# Altium PCB CoreEP3C16.PcbDoc
Units mil, origin at the board's own origin, x right, y up, seen from the top; angles counter-clockwise.
Board outline 6000 x 4000 mil, 2 copper layers (Top Layer, Bottom Layer); 4 components, 0 nets, 154 pads, 0 vias.
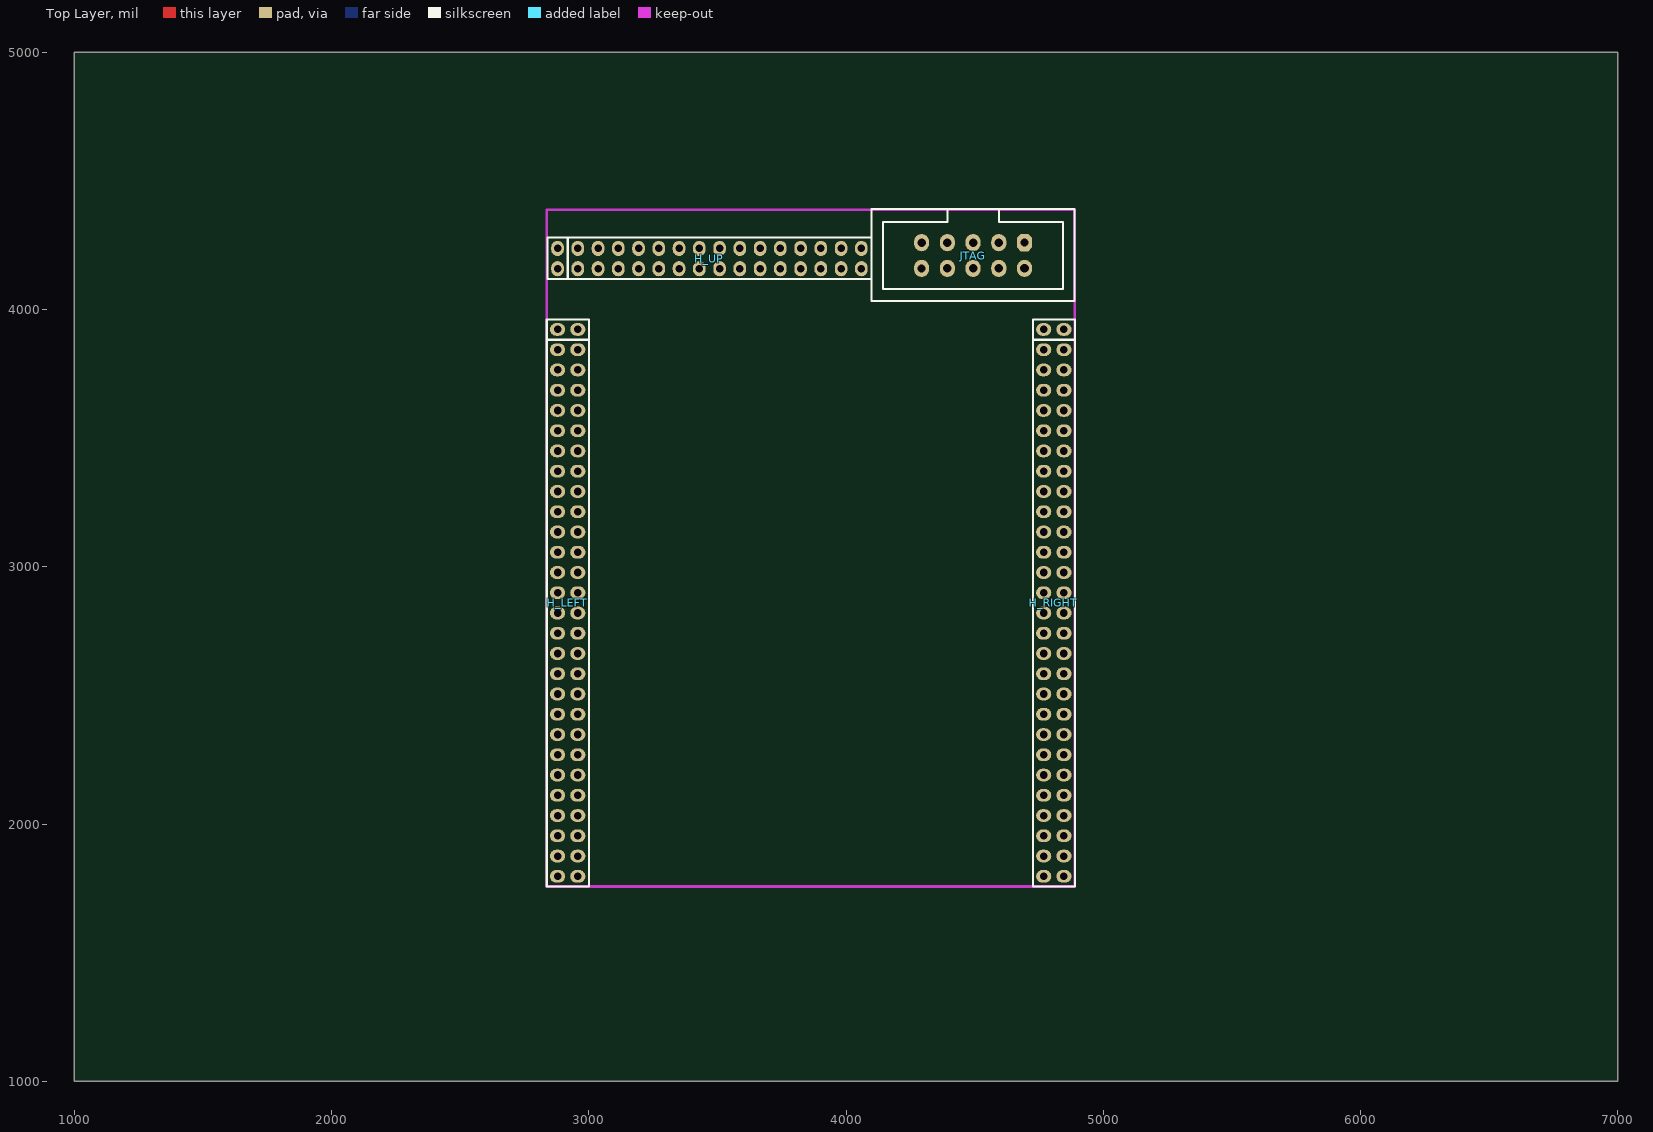
[diagram p0: Top Layer view]
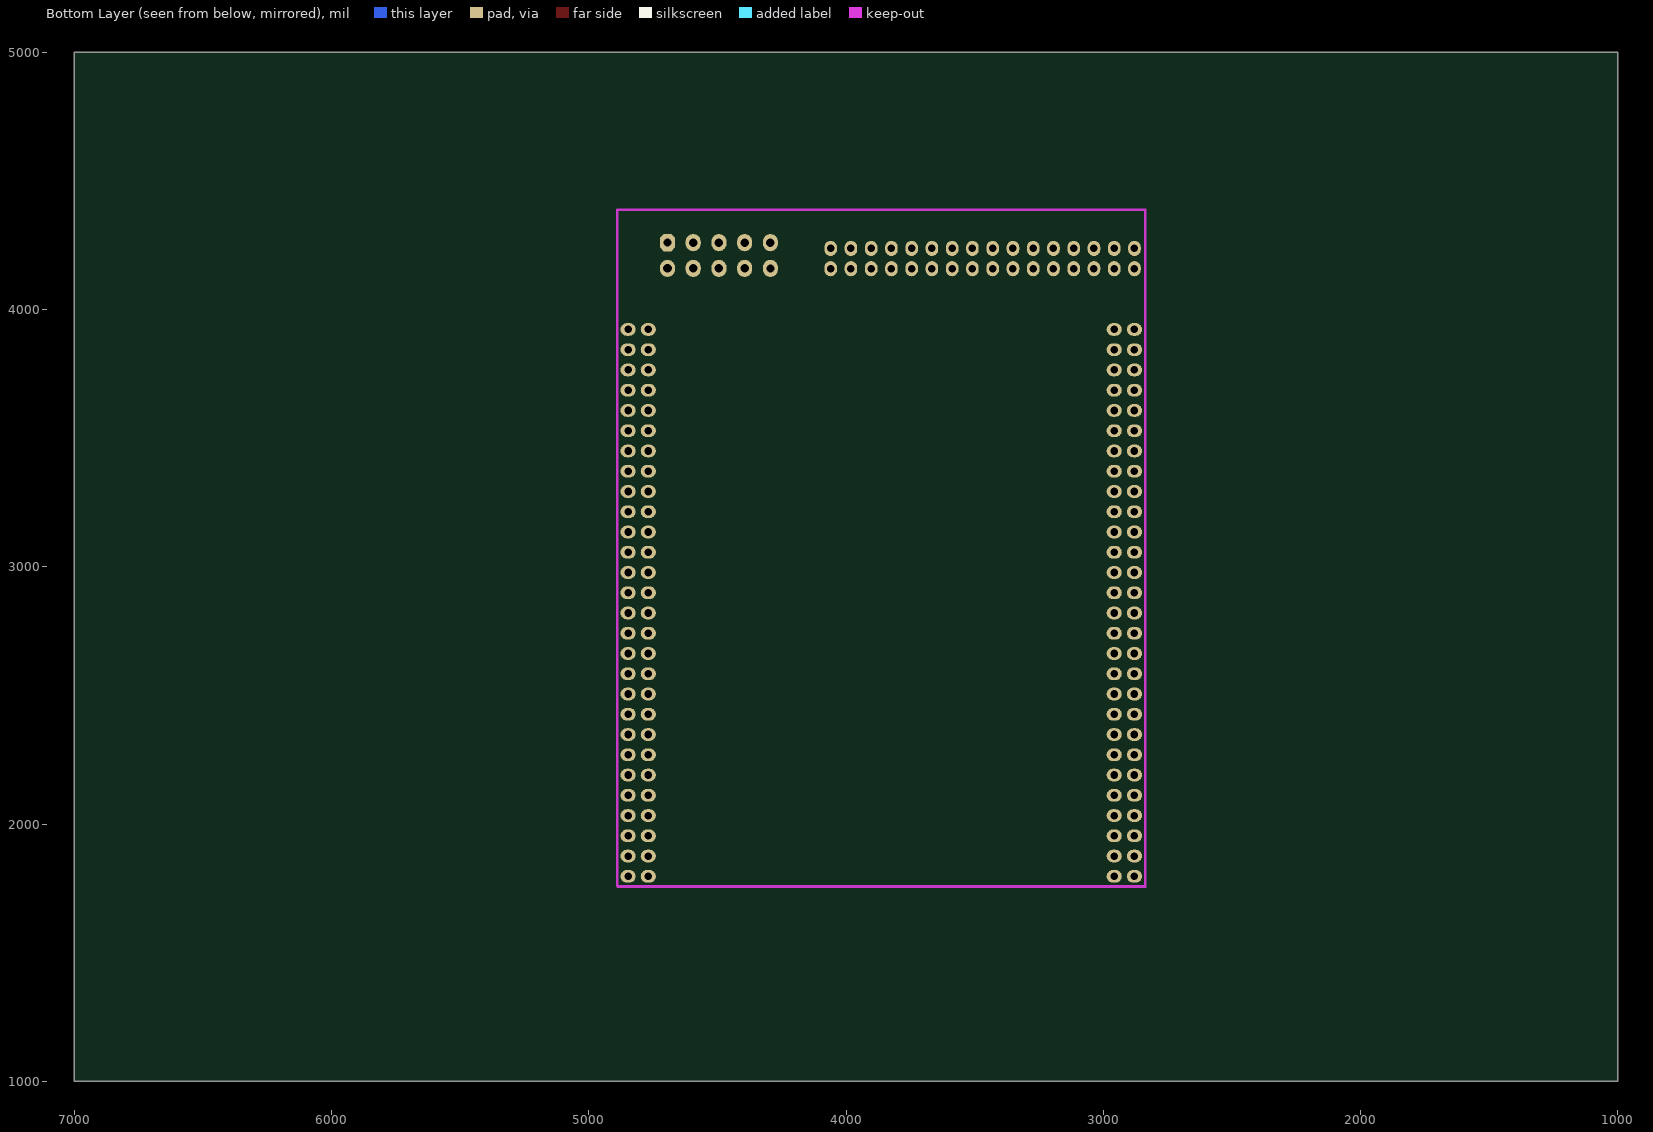
[diagram p1: Bottom Layer view, seen from below]

## Layer stack, top to bottom
Top Layer: signal copper 1.4
Dielectric: dielectric 12.6, FR-4, Dk 4.8
Bottom Layer: signal copper 1.4

## Board outline
1000,1000 7000,1000 7000,5000 1000,5000

## Design rules (kind name [scope] priority, off if disabled: settings)
Clearance [All] p1: gap=10
PolygonConnect [All] p1: connectstyle=Relief reliefconductorwidth=10 reliefentries=4 polygonreliefangle="90 Angle" airgapwidth=10
RoutingVias [All] p1: holewidth=28 width=50 viastyle="Through Hole" minholewidth=28 minwidth=50 maxholewidth=28 maxwidth=50
SolderMaskExpansion [All] p1: expansion=4
Width [All] p1: maxlimit=10 minlimit=10 preferedwidth=10
28 further rules are at their usual default settings.

## Components (designator, comment, footprint, x,y, rotation, side; value= is the part's Value field where it differs from the comment)
H_LEFT "Header 28X2" "HEADER 28X2 - 2MM" 2878.65,3922.6 r0 top locked
H_RIGHT "Header 28X2" "HEADER 28X2 - 2MM" 4768.41,3922.6 r0 top locked
H_UP "Header 16X2" "Header 16X2 - 2mm" 2878.65,4158.82 r90 top locked
JTAG "JTAG" ISP_10 4694,4260 r270 top locked

## Footprints (in the part's own frame and the unit in brackets; to place one, negate y for a bottom-side part, rotate by r counter-clockwise, add the part's x,y. Pads: shape width x height; smd on the part's side, far side on the other; paste and mask are expansions set on the pad)
"Header 16X2 - 2mm" [mm]
  oval 1.5x1.25 hole 0.75: 1(0,0) 2(2,0) 3(0,-2) 4(2,-2) 5(0,-4) 6(2,-4) 7(0,-6) 8(2,-6) 9(0,-8) 10(2,-8) 11(0,-10) 12(2,-10) 13(0,-12) 14(2,-12) 15(0,-14) 16(2,-14) 17(0,-16) 18(2,-16) 19(0,-18) 20(2,-18) 21(0,-20) 22(2,-20) 23(0,-22) 24(2,-22) 25(0,-24) 26(2,-24) 27(0,-26) 28(2,-26) 29(0,-28) 30(2,-28) 31(0,-30) 32(2,-30)
  silkscreen extent -1,-31 3.1,1
"HEADER 28X2 - 2MM" [mm]
  oval 1.5x1.25 hole 0.75: 1(0,0) 2(2,0) 3(0,-2) 4(2,-2) 5(0,-4) 6(2,-4) 7(0,-6) 8(2,-6) 9(0,-8) 10(2,-8) 11(0,-10) 12(2,-10) 13(0,-12) 14(2,-12) 15(0,-14) 16(2,-14) 17(0,-16) 18(2,-16) 19(0,-18) 20(2,-18) 21(0,-20) 22(2,-20) 23(0,-22) 24(2,-22) 25(0,-24) 26(2,-24) 27(0,-26) 28(2,-26) 29(0,-28) 30(2,-28) 31(0,-30) 32(2,-30) 33(0,-32) 34(2,-32) 35(0,-34) 36(2,-34) 37(0,-36) 38(2,-36) 39(0,-38) 40(2,-38) 41(0,-40) 42(2,-40) 43(0,-42) 44(2,-42) 45(0,-44) 46(2,-44) 47(0,-46) 48(2,-46) 49(0,-48) 50(2,-48) 51(0,-50) 52(2,-50) 53(0,-52) 54(2,-52) 55(0,-54) 56(2,-54)
  silkscreen extent -1.07,-54.99 3.1,1
ISP_10 [mm]
  oct 1.7x1.5 hole 0.8: 1(0,0)
  oval 1.7x1.5 hole 0.85: 2(2.54,0) 3(0,-2.54) 4(2.54,-2.54) 5(0,-5.08) 6(2.54,-5.08) 7(0,-7.62) 8(2.54,-7.62) 9(0,-10.16)
  oval 1.7x1.5 hole 0.8: 10(2.54,-10.16)
  silkscreen extent -3.3,-15.12 5.75,4.95

## Part data
H_UP: "Header, 16-Pin, Dual row"

## Nets (pads, with @x,y where several pads share a name; then routed paths per layer and width w, separated by ;. In a path a pad name is that pad's centre, name@x,y a point inside that pad or via, vN(x,y) a via of type N, cw(c..) or ccw(c..) an arc to the next point about the centre after c; other vN are vias at no path point)
pads on no net: H_LEFT.1 H_LEFT.2 H_LEFT.3 H_LEFT.4 H_LEFT.5 H_LEFT.6 H_LEFT.7 H_LEFT.8 H_LEFT.9 H_LEFT.10 H_LEFT.11 H_LEFT.12 H_LEFT.13 H_LEFT.14 H_LEFT.15 H_LEFT.16 H_LEFT.17 H_LEFT.18 H_LEFT.19 H_LEFT.20 H_LEFT.21 H_LEFT.22 H_LEFT.23 H_LEFT.24 H_LEFT.25 H_LEFT.26 H_LEFT.27 H_LEFT.28 H_LEFT.29 H_LEFT.30 H_LEFT.31 H_LEFT.32 H_LEFT.33 H_LEFT.34 H_LEFT.35 H_LEFT.36 H_LEFT.37 H_LEFT.38 H_LEFT.39 H_LEFT.40 H_LEFT.41 H_LEFT.42 H_LEFT.43 H_LEFT.44 H_LEFT.45 H_LEFT.46 H_LEFT.47 H_LEFT.48 H_LEFT.49 H_LEFT.50 H_LEFT.51 H_LEFT.52 H_LEFT.53 H_LEFT.54 H_LEFT.55 H_LEFT.56 H_RIGHT.1 H_RIGHT.2 H_RIGHT.3 H_RIGHT.4 H_RIGHT.5 H_RIGHT.6 H_RIGHT.7 H_RIGHT.8 H_RIGHT.9 H_RIGHT.10 H_RIGHT.11 H_RIGHT.12 H_RIGHT.13 H_RIGHT.14 H_RIGHT.15 H_RIGHT.16 H_RIGHT.17 H_RIGHT.18 H_RIGHT.19 H_RIGHT.20 H_RIGHT.21 H_RIGHT.22 H_RIGHT.23 H_RIGHT.24 H_RIGHT.25 H_RIGHT.26 H_RIGHT.27 H_RIGHT.28 H_RIGHT.29 H_RIGHT.30 H_RIGHT.31 H_RIGHT.32 H_RIGHT.33 H_RIGHT.34 H_RIGHT.35 H_RIGHT.36 H_RIGHT.37 H_RIGHT.38 H_RIGHT.39 H_RIGHT.40 H_RIGHT.41 H_RIGHT.42 H_RIGHT.43 H_RIGHT.44 H_RIGHT.45 H_RIGHT.46 H_RIGHT.47 H_RIGHT.48 H_RIGHT.49 H_RIGHT.50 H_RIGHT.51 H_RIGHT.52 H_RIGHT.53 H_RIGHT.54 H_RIGHT.55 H_RIGHT.56 H_UP.1 H_UP.2 H_UP.3 H_UP.4 H_UP.5 H_UP.6 H_UP.7 H_UP.8 H_UP.9 H_UP.10 H_UP.11 H_UP.12 H_UP.13 H_UP.14 H_UP.15 H_UP.16 H_UP.17 H_UP.18 H_UP.19 H_UP.20 H_UP.21 H_UP.22 H_UP.23 H_UP.24 H_UP.25 H_UP.26 H_UP.27 H_UP.28 H_UP.29 H_UP.30 H_UP.31 H_UP.32 JTAG.1 JTAG.2 JTAG.3 JTAG.4 JTAG.5 JTAG.6 JTAG.7 JTAG.8 JTAG.9 JTAG.10

## Keep-outs
Keep-Out Layer:
  lines w10: 2837,1757 4887,1757 4890,1760 4890,4388 2837,4388 2837,1757